# Altium PCB Copy of WoodStoveLayout2.PcbDoc (part 4 of 4)
Units mil, origin at the board's own origin, x right, y up, seen from the top; angles counter-clockwise.
Board outline 4000 x 3000 mil, 4 copper layers (Top Layer, L2, L3, Bottom Layer), stack 64.6 mil thick; 132 components, 92 nets, 551 pads, 53 vias.
Unrouted connection lines stored in the file: 211.
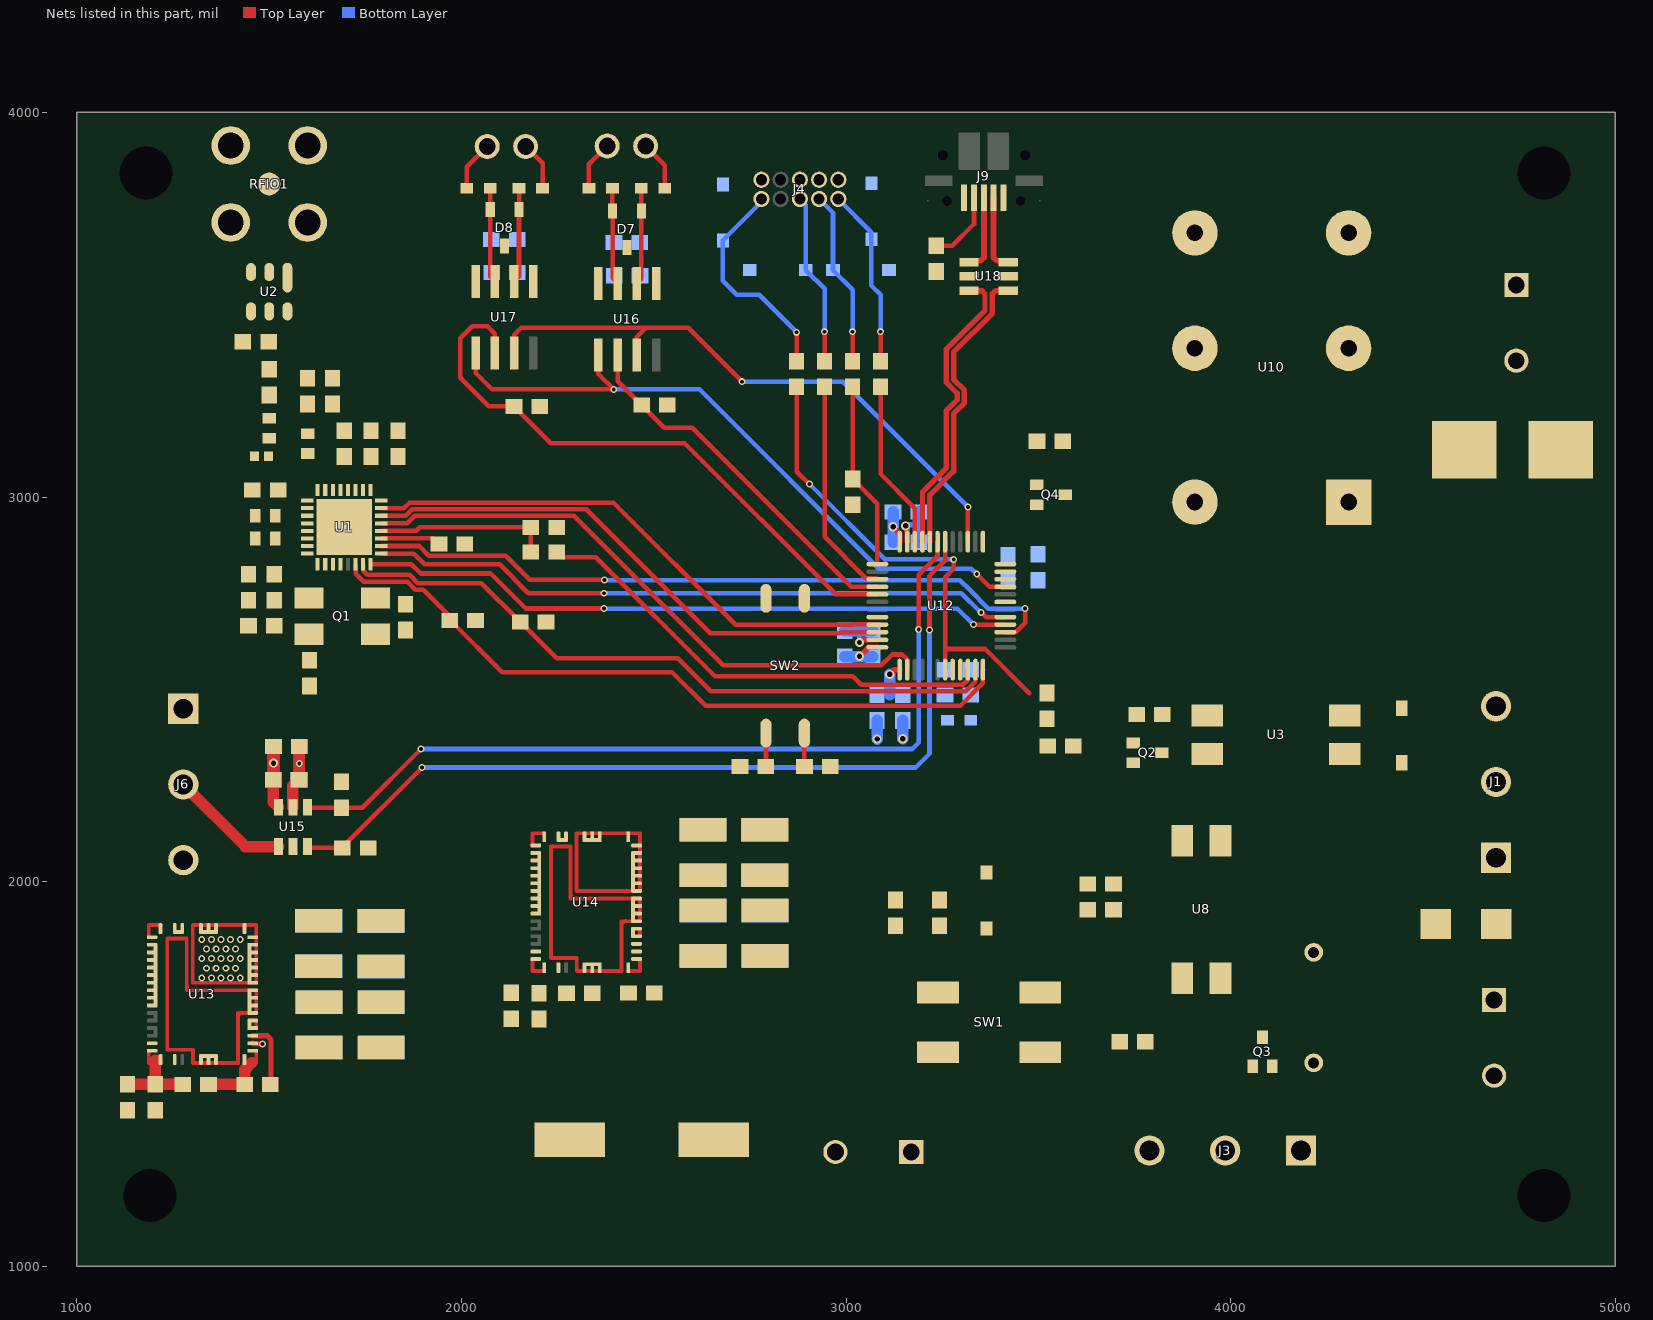
[diagram p4: the nets of this part, all layers, seen from the top]

## Part data (continued)
U3 U8: "OPTOISOLATOR 5KV TRANSISTOR 4SMD 20mA/1.2V saturation", Case/Package=SMD/SMT, Collector Emitter Saturation Voltage=200mV, Current Transfer Ratio=600%, Forward Current=50mA, Forward Voltage=1.4V, Isolation Voltage=5kV, Manufacturer="ON Semiconductor / Fairchild", Max Operating Temperature=110°C, Max Output Voltage=70V, Max Power Dissipation=200mW, Min Operating Temperature=-55°C, Package Quantity=1, Reverse Breakdown Voltage=6V, Supplier Part Number 1=FOD817D3SDTR-ND, Collector Emitter Voltage (VCEO)=200mV, ComponentLink1Description=https://datasheet.ciiva.com/25620/0900766b810e24fa-25620565.pdf, ComponentLink1URL=https://datasheet.ciiva.com/25620/0900766b810e24fa-25620565.pdf, ComponentLink2Description=https://datasheet.ciiva.com/26122/fod817d-26122105.pdf, ComponentLink2URL=https://datasheet.ciiva.com/26122/fod817d-26122105.pdf, ComponentLink3Description=https://datasheet.ciiva.com/15118/getdatasheetpartid-67082-15118458.pdf, ComponentLink3URL=https://datasheet.ciiva.com/15118/getdatasheetpartid-67082-15118458.pdf, ComponentLink4Description=https://datasheet.ciiva.com/2086/fod817d-2086155.pdf, ComponentLink4URL=https://datasheet.ciiva.com/2086/fod817d-2086155.pdf, ComponentLink5Description=https://datasheet.ciiva.com/46433/1563587-46433595.pdf, ComponentLink5URL=https://datasheet.ciiva.com/46433/1563587-46433595.pdf, ComponentLink6Description=https://datasheet.ciiva.com/2086/fod817d-2086156.pdf, ComponentLink6URL=https://datasheet.ciiva.com/2086/fod817d-2086156.pdf, ComponentLink7Description=https://datasheet.ciiva.com/2086/fod817d-2086157.pdf, ComponentLink7URL=https://datasheet.ciiva.com/2086/fod817d-2086157.pdf, ComponentLink8Description=https://datasheet.ciiva.com/8095/fod817d-8095549.pdf, ComponentLink8URL=https://datasheet.ciiva.com/8095/fod817d-8095549.pdf, ComponentLink9Description=https://datasheet.ciiva.com/4701/fod817d-4701711.pdf, ComponentLink9URL=https://datasheet.ciiva.com/4701/fod817d-4701711.pdf, ComponentLink10Description=https://datasheet.ciiva.com/17001/fod817-17001647.pdf, ComponentLink10URL=https://datasheet.ciiva.com/17001/fod817-17001647.pdf, Fall Time=18000ns, Input Current=50mA, Lead Free="Lead Free", Manufacturer Part Number=FOD817D3SD, Max Collector Current=50mA, Max Input Current=50mA, Mount="Surface Mount", Number of Channels=1, Number of Circuits=1, Number of Elements=1, Number of Pins=4, Output Current per Channel=50mA, Output Voltage=70V, Packaging="Tape and Reel", Power Dissipation=200mW, Pricing 1="1000=0.15939, 2000=0.14611, 5000=0.13283, 10000=0.12397, 25000=0.11954, 50000=0.11512 (USD)", Radiation Hardening=No, REACH SVHC="No SVHC", Rise Time=18000ns, Stock 1=123000, Supplier 1=Digi-Key, Weight=0g
U5: "DIODE SCHOTTKY 40V 1A SOD123"
U10: "RELAY GENERAL PURPOSE DPST 8A 3V 67mA coil drive 45ohm coil resistance"
U11: Case/Package=SMD/SMT, Current Rating=2A, DC Cold Resistance=39mR, Manufacturer=Bel, Manufacturer Part Number=SSQ2, Max Operating Temperature=125°C, Min Operating Temperature=-55°C, Supplier Part Number 1=507-1048-2-ND, Voltage Rating (AC)=125V, Approvals=CSA,CE,cULus, ComponentLink1Description=https://datasheet.ciiva.com/300/ssq-300722.pdf, ComponentLink1URL=https://datasheet.ciiva.com/300/ssq-300722.pdf, ComponentLink2Description=https://datasheet.ciiva.com/300/ssq-300723.pdf, ComponentLink2URL=https://datasheet.ciiva.com/300/ssq-300723.pdf, ComponentLink3Description=https://datasheet.ciiva.com/300/ssq-300724.pdf, ComponentLink3URL=https://datasheet.ciiva.com/300/ssq-300724.pdf, Fuse Type="Board Mount (Cartridge Style Excluded)", Height=0.1inch, Length=0.24inch, Mount="Surface Mount", Packaging="Tape and Reel", Pricing 1="1000=0.15908, 2000=0.14847, 3000=0.14582, 5000=0.14317, 10000=0.13787 (USD)", Stock 1=59000, Supplier 1=Digi-Key, Voltage Rating (DC)=125V, Width=0.1inch
U12: library part STM32L433CCTx
U13 U14: "4V to 36V, 2A Step-Down DC/DC Power Module"
U15: "Self-Calibrating, 16-Bit Analog-to-Digital Converter 6-SOT-23 -40 to 85"
U16 U17: "K type thermocouple amplifier"
U18: "2-Channel Ultra Low Clamp Voltage ESD Solution with Series-Resistor Isolation 6-SOT-23 -40 to 85", Package="SOT-23-6 Texas Instruments", Availability=Good, MF="Texas Instruments", MP=TPD2S017DBVR, Price="0.32 USD", SnapEDA_Link=https://www.snapeda.com/parts/TPD2S017DBVR/Texas%20Instruments/view-part/?ref=snap

## Free pads (board coordinates)
  round 60 hole 137.8 unplated: 2(1180,3842) 2(1191,1184) 2(4815,1184) 2(4815,3842)

## Via types
v1: diameter 18, hole 10, Top Layer to Bottom Layer, tented top, 23 vias
v2: diameter 18, hole 10, Top Layer to Bottom Layer, 22 vias
v3: diameter 24, hole 14, Top Layer to Bottom Layer, 8 vias

## Nets (pads, with @x,y where several pads share a name; then routed paths per layer and width w, separated by ;. In a path a pad name is that pad's centre, name@x,y a point inside that pad or via, vN(x,y) a via of type N, cw(c..) or ccw(c..) an arc to the next point about the centre after c; other vN are vias at no path point)
3VSWRelief: U14.9 U14.10 U14.11
"5V PWM": J1.3 U3.4 U5.C
5VSWRelief: U13.9 U13.10 U13.11
12V: J3.1 Q3.3
12VFAN: D?.1 J1.1 J2.1
+3V3: C1.2 C16.2 C17.2 C18.2 C19.2 C20.2 C21.2 C22.2 C23.2 C39.2 C40.2 C41.2 C42.2 C43.2 C48.2 C49.2 C50.2 C51.2 FB1.1 J4.1 R1.2 R4.2 R5.2 R8.1 R10.2 R11.1 R17.2 R22.2 R23.2 R27.2 R32.2 R35.2 R36.2 R37.2 R38.2 U1.26 U12.1 U12.24 U12.36 U12.48 U14.6 U14.7 U14.8 U16.4 U17.4 | length 337.5
  Top Layer w14: v3(3035,2586) 3058.3,2609.3 U12.48@3081.52,2609.3 ; v3(3114,2539) 3126.23,2551.23 U12.1@3139.59,2551.23 ; v3(3122.4,2922.6) 3139.59,2905.41 U12.36@3139.59,2883.91
  Bottom Layer w14: v3(3122.4,2922.6) v3@3122.4,2927
  Bottom Layer w30: C21.2@2996.86,2585.11 C17.2@3069.85,2585.11 ; 3114,2486.04 v3(3114,2539) ; C18.2@3122.4,2882.57 v3(3122.4,2922.6) ; v3@3122.4,2927 C22.2@3122.4,2961.49
+5V: C29.2 C30.2 C31.2 C32.2 C33.2 C44.2 C45.2 C46.2 C47.2 J6.1 R29.2 U13.6 U13.7 U13.8 U15.5 | length 251.6
  Top Layer w30: U15.5@1562,2193.66 1562,2249 C45.2@1578,2265 v2@1578,2307.39 ; v2(1578.39,2307.39) C44.2@1578.39,2351.48
  Bottom Layer w30: C46.2@1578,2265 1578.39,2265.39 v2(1578.39,2307.39) ; v2@1578,2307 v2(1578.39,2307.39) ; C47.2@1578.39,2351.48 v2(1578.39,2307.39)
  other v1: 1325,1750 1350,1750 1375,1750 1400,1750 1425,1750 1337.5,1775 1362.5,1775 1387.5,1775 1412.5,1775 1325,1800 1350,1800 1375,1800 1400,1800 1425,1800 1337.5,1825 1362.5,1825 1387.5,1825 1412.5,1825 1325,1850 1350,1850 1375,1850 1400,1850 1425,1850
+12V: C25.2 C26.2 C27.2 C28.2 C34.1 C35.2 C36.2 C37.2 C38.2 J10.2 U13.2 U13.4 U14.2 U14.4 | length 26.1
  Top Layer w14: U13.2@1457.7,1579.95 U13.2@1457.7,1579.95 1459.75,1578 v2(1483,1578)
"AC In": J5.2 U11.1
"AC Out": J5.1 U10.4
ACFUSE: U10.3 U11.2
DoorSig: J3.2 Q3.1
FANGND: D?.2 J1.2 J2.2 U3.3 U5.A
GND: C1.1 C2.1 C3.1 C4.2 C6.1 C7.1 C8.1 C11.2 C14.1 C15.1 C16.1 C17.1 C18.1 C19.1 C20.1 C21.1 C22.1 C23.1 C25.1 C26.1 C27.1 C28.1 C30.1 C31.1 C32.1 C33.1 C34.2 C35.1 C36.1 C37.1 C38.1 C40.1 C41.1 C42.1 C43.1 C44.1 C45.1 C46.1 C47.1 C48.1 C49.1 C50.1 C51.1 D2.A D3.A D4.A D5.A D6.A D7.3 D8.3 J3.3 J4.3 J4.5 J4.9 J6.3 J9.5 J10.1 Q1.2 Q1.4 Q2.2 Q4.2 R3.1 R7.1 R25.2 R28.1 R39.1 RFIO1.P1 RFIO1.P2 RFIO1.P3 RFIO1.P4 SW1.3 SW1.4 U1.0 U1.1 U1.2 U1.8 U1.9 U1.12 U1.24 U1.25 U1.30 U1.32 U2.1 U2.3 U2.4 U2.6 U8.2 U8.3 U10.5 U10.6 U12.8 U12.23 U12.35 U12.47 U13.5 U13.14 U13.18 U14.5 U14.14 U14.18 U15.2 U15.6 U16.1 U17.1 U18.2 | length 662.5
  Top Layer w14: v3(3035,2622) 3041.99,2628.99 U12.47@3081.52,2628.99 ; v3(3155,2925) 3159.28,2920.72 U12.35@3159.28,2883.91
  Top Layer w30: C44.1@1511.46,2351.48 v3(1511.46,2308.44) 1511.46,2265.39 C45.1@1511.07,2265 1511.07,2207.19 U15.6@1524.6,2193.66
  Bottom Layer w14: 3033,2652.04 3035,2650.04 v3(3035,2622) ; v3(3155,2925) 3152,2928 3189.32,2928
  Bottom Layer w30: C46.1@1511.07,2265 1511.46,2265.39 v3(1511.46,2308.44) C47.1@1511.46,2351.48 ; C21.1@2996.86,2652.04 3033,2652.04 C17.1@3069.85,2652.04 ; v3(3080.86,2371) C20.1@3080.86,2419.11 ; v3(3147.59,2371.59) C16.1@3147.59,2419.11 ; C18.1@3189.32,2882.57 3189.32,2928 C22.1@3189.32,2961.49
NetC2_2: C2.2 U1.27
NetC3_2: C3.2 U1.28
NetC4_1: C4.1 Q1.3 U1.11
NetC5_1: C5.1 C6.2 U2.5
NetC5_2: C5.2 L2.1
NetC7_2: C7.2 Q1.1 U1.10
NetC8_2: C8.2 L1.1 L2.2 U1.31
NetC9_1: C9.1 C12.1 U1.6
NetC9_2: C9.2 R6.2 U1.7
NetC10_1: C10.1 R7.2
NetC10_2: C10.2 L1.2 U1.29
NetC11_1: C11.1 L3.1 L4.1 U1.3
NetC12_2: C12.2 R6.1
NetC13_2: C13.2 R25.1
NetC14_2: C14.2 C15.2 FB1.2 U12.9
NetC29_1: C29.1 R29.1 R31.2 U13.15 U13.16 | length 206.4
  Top Layer w30: C29.1@1131.8,1472.91 R29.1@1204.16,1472.91 ; 1204.16,1535.68 1204.16,1528.77 R29.1@1204.16,1472.91 ; R31.2@1275.42,1472.91 R29.1@1204.16,1472.91
NetC39_1: C39.1 R32.1 R34.2 U14.15 U14.16
NetD1_1: D1.1 R10.1 U8.4 U12.19
NetD1_2: D1.2 R11.2
NetD2_C: D2.C J4.2 R16.2 | length 467.1
  Top Layer w12: R16.2@3090,3353.46 v2(3090,3430)
  Bottom Layer w12: J4.2@2980,3775.04 3066.04,3689.01 D2.C@3066.04,3670 3066.04,3550 3090,3526.04 v2(3090,3430)
NetD3_C: D3.C J4.4 R15.2 | length 457.7
  Top Layer w12: R15.2@3017.21,3353.46 v2(3017.21,3430)
  Bottom Layer w12: J4.4@2930,3775.04 2966.26,3738.79 D3.C@2966.26,3590 3017.21,3539.05 v2(3017.21,3430)
NetD4_C: D4.C J4.6 R14.2 | length 448.3
  Top Layer w12: R14.2@2944.42,3353.46 v2(2944.42,3430)
  Bottom Layer w12: J4.6@2880,3775.04 2895.67,3759.37 D4.C@2895.67,3590 2944.42,3541.25 v2(2944.42,3430)
NetD5_C: D5.C J4.10 R13.2 | length 576.4
  Top Layer w12: R13.2@2871.63,3353.46 v2(2871.63,3428.37)
  Bottom Layer w12: J4.10@2780,3775.04 2780,3767.17 D5.C@2680,3667.17 2680,3562 2715.96,3526.04 2773.96,3526.04 v2(2871.63,3428.37)
NetD6_C: D6.C R23.1 R24.2 SW1.1 SW1.2
NetD7_1: D7.1 FB2.2 U16.2 | length 252
  Top Layer w12: U16.2@2456.09,3555.61 2467.9,3567.41 D7.1@2467.9,3743.61 2467.9,3802.29 FB2.2@2467.58,3802.61
NetD7_2: D7.2 FB3.2 U16.3 | length 252.6
  Top Layer w12: FB3.2@2392.6,3802.61 2392.6,3744.1 D7.2@2393.09,3743.61 2393.09,3568.61 U16.3@2406.09,3555.61
NetD8_1: D8.1 FB4.2 U17.2 | length 247.4
  Top Layer w12: U17.2@2137.09,3560.61 2149.9,3573.41 D8.1@2149.9,3747.61 2150.09,3747.81 FB4.2@2150.09,3802.61
NetD8_2: D8.2 FB5.2 U17.3 | length 247
  Top Layer w12: FB5.2@2075.09,3802.61 D8.2@2075.09,3747.61 2075.09,3572.61 U17.3@2087.09,3560.61
NetFB2_1: FB2.1 J7.2 | length 130.5
  Top Layer w12: J7.2@2479.09,3912.61 2528.6,3863.1 FB2.1@2528.6,3802.61
NetFB3_1: FB3.1 J7.1 | length 129.7
  Top Layer w12: FB3.1@2331.58,3802.61 2331.58,3865.1 J7.1@2379.09,3912.61
NetFB4_1: FB4.1 J8.2 | length 127.2
  Top Layer w12: J8.2@2167.09,3911.61 2211.12,3867.58 FB4.1@2211.12,3802.61
NetFB5_1: FB5.1 J8.1 | length 131
  Top Layer w12: FB5.1@2014.07,3802.61 2014.07,3858.58 J8.1@2067.09,3911.61
NetJ9_4: J9.4 R39.2 | length 189.4
  Top Layer w12: R39.2@3234.76,3653.46 3276.3,3653.46 3332.85,3710.01 J9.4@3332.85,3777.92
NetL3_2: L3.2 U1.4
NetL4_2: L4.2 U1.5
NetQ2_1: Q2.1 U12.22
NetQ2_3: Q2.3 U3.2
NetQ3_2: Q3.2 R9.2
NetQ4_1: Q4.1 U12.25
NetQ4_3: Q4.3 U10.1
NetR1_1: R1.1 R2.1 U1.20 | length 456.7
  Top Layer w12: U1.20@1791.59,2912.11 1883.08,2912.11 1892.04,2921.06 R1.1@2180.63,2921.06 R2.1@2180.63,2857.06
NetR2_2: R2.2 U12.10 | length 1244.4
  Top Layer w12: R2.2@2247.56,2857.06 2261.24,2843.37 2349.84,2843.37 2659.41,2533.8 3017.42,2533.8 3039.53,2511.69 3304.07,2511.69 3316.66,2524.28 3316.66,2551.14 U12.10@3316.76,2551.23
NetR3_2: R3.2 U1.19 | length 156.2
  Top Layer w12: U1.19@1791.59,2892.42 1791.9,2892.74 1926.95,2892.74 R3.2@1941.63,2878.06
NetR4_1: R4.1 U1.14 U12.12 | length 1865
  Top Layer w12: U1.14@1724.86,2825.69 1724.86,2800.39 1745.86,2779.39 1859.96,2779.39 1879.96,2759.39 1900.38,2759.39 1969.63,2690.14 R4.1@1969.63,2679.06 1971.6,2679.06 2105.8,2544.86 2547.67,2544.86 2635.3,2457.22 3297.69,2457.22 3356.03,2515.56 3356.03,2551.14 U12.12@3356.13,2551.23
NetR5_1: R5.1 U1.15 U12.11 | length 1780.7
  Top Layer w12: U1.15@1744.54,2825.69 1744.54,2808.56 1755,2798.1 1865.29,2798.1 1887,2776.39 2052.13,2776.39 R5.1@2153.13,2675.39 2247.88,2580.64 2562.23,2580.64 2648.18,2494.69 3311.12,2494.69 3336.35,2519.92 3336.35,2551.14 U12.11@3336.44,2551.23
NetR8_2: R8.2 U3.1
NetR9_1: R9.1 U8.1
NetR14_1: R14.1 U12.39 | length 572.6
  Top Layer w12: R14.1@2944.42,3286.54 2944.42,2896.71 3051.88,2789.25 3078.74,2789.25 U12.39@3081.52,2786.47
NetR15_1: R15.1 R17.1 U12.37 | length 487.3
  Top Layer w12: R15.1@3017.21,3286.54 3017.21,3047.15 R17.1@3017.42,3046.94 3081.52,2982.83 U12.37@3081.52,2825.84
NetR16_1: R16.1 U12.34 | length 439.5
  Top Layer w12: R16.1@3090,3286.54 3090,3060 3178.96,2971.04 U12.34@3178.96,2883.91
NetR22_1: R22.1 U10.8
NetR27_1: R27.1 SW2.3 | length 87
  Top Layer w12: R27.1@2791.32,2299.57 2791.86,2300.11 SW2.3@2791.86,2386.37
NetR28_2: R28.2 SW2.4 | length 86.8
  Top Layer w12: SW2.4@2891.86,2386.37 R28.2@2891.93,2299.57 R28.2@2891.93,2299.57
NetR30_1: R30.1 R31.1 U13.1 | length 157.5
  Top Layer w30: R31.1@1342.35,1472.91 1342.44,1473 R30.1@1436.54,1473 1436.54,1510.78 1454.53,1528.77
NetR30_2: R30.2 U13.3 | length 170.9
  Top Layer w14: U13.3@1457.7,1599.64 1495.06,1599.64 1505,1589.7 1505,1479.37 R30.2@1511.46,1472.91
NetR33_1: R33.1 R34.1 U14.1
NetR33_2: R33.2 U14.3
NetR35_1: R35.1 U12.30 U15.3 | length 2289.1
  Top Layer w12: U15.3@1599.4,2091.3 1602.7,2088 R35.1@1690.54,2088 1690.54,2089.54 v2(1898,2297) ; v2(3217,2654) 3217,2795 3257.7,2835.7 U12.30@3257.7,2883.91
  Bottom Layer w12: v2(1898,2297) 3181,2297 3217,2333 v2(3217,2654)
NetR36_1: R36.1 U12.31 U15.4 | length 2202.5
  Top Layer w12: U15.4@1599.4,2193.66 1600.53,2192.54 R36.1@1688,2192.54 1742.54,2192.54 v2(1895,2345) ; v2(3189,2656) 3189,2798 3238.02,2847.02 U12.31@3238.02,2883.91
  Bottom Layer w12: v2(1895,2345) 3172,2345 3189,2362 v2(3189,2656)
NetR37_1: R37.1 U12.40 U16.6 | length 965.1
  Top Layer w12: U16.6@2406.09,3369.61 2406.09,3301.44 R37.1@2468.54,3239 2527.54,3180 2600,3180 3013.22,2766.78 U12.40@3081.52,2766.78
NetR38_1: R38.1 U12.41 U17.6 | length 1582
  Top Layer w12: U17.6@2087.09,3374.61 2087,3374.52 2087,3425 2068,3444 2028,3444 1997,3413 1997,3310 2071.33,3235.67 R38.1@2136.63,3235.67 2232.3,3140 2580,3140 2972.9,2747.1 U12.41@3081.52,2747.1
NetRFIO1_1: RFIO1.1 U2.2
NetSW2_1: SW2.1 SW2.2 U12.44
NetU1_16: U1.16 U12.16 | length 1713.6
  Top Layer w12: U1.16@1764.23,2825.69 1869.7,2825.69 1894,2801.39 2076.61,2801.39 2167.61,2710.39 v2@2369.58,2710.39 ; v2(3331.64,2668.36) U12.16@3414.2,2668.36
  Bottom Layer w12: v2(2371,2710) 3290,2710 v2(3331.64,2668.36)
NetU1_17: U1.17 U12.17 | length 1689.4
  Top Layer w12: U1.17@1791.59,2853.05 1876.34,2853.05 1904.38,2825 2099.38,2825 2174,2750.39 v2@2369.58,2750.39 ; v2(3351.55,2700) 3353.17,2700 3365.13,2688.04 U12.17@3414.2,2688.04
  Bottom Layer w12: v2(2371,2750) 3300,2750 3350,2700 v2(3351.55,2700)
NetU1_18: U1.18 U12.15 | length 1837.2
  Top Layer w12: U1.18@1791.59,2872.74 1890.06,2872.74 1915.42,2847.37 2115.01,2847.37 2177.42,2784.96 v2@2369.58,2784.96 ; U12.15@3414.2,2648.67 3414.29,2648.77 3441.15,2648.77 3465.72,2673.33 v2(3465.72,2710)
  Bottom Layer w12: v2(2372,2784) 3296.05,2784 3321.25,2758.8 3321.25,2758.58 3369.83,2710 v2(3465.72,2710)
NetU1_21: U1.21 U12.2 | length 1580.6
  Top Layer w12: U1.21@1791.59,2931.79 1859.2,2931.79 1879.15,2951.74 2291.82,2951.74 2680.56,2563 3092,2563 3119.78,2590.78 3146.59,2590.78 3159.18,2578.19 3159.18,2551.33 U12.2@3159.28,2551.23
NetU1_22: U1.22 U12.46 | length 1431.6
  Top Layer w12: U1.22@1791.59,2951.48 1854.84,2951.48 1872.11,2968.74 2325.16,2968.74 2647.55,2646.36 2986.16,2646.36 2988.48,2648.67 U12.46@3081.52,2648.67
NetU1_23: U1.23 U12.45 | length 1428
  Top Layer w12: U1.23@1791.59,2971.16 1850.48,2971.16 1865.07,2985.74 2395.49,2985.74 2712.87,2668.36 3016.81,2668.36 3017.44,2668.99 3080.89,2668.99 U12.45@3081.52,2668.36
NetU12_21: U12.21 U16.5 U17.5 | length 1765.6
  Top Layer w12: U17.5@2037.09,3374.61 2037.09,3322.5 2079.59,3280 v2(2396.09,3280) 2356.09,3320 U16.5@2356.09,3369.61 ; v2(3340,2800) 3373.22,2766.78 U12.21@3414.2,2766.78
  Bottom Layer w12: v2(2396.09,3280) 2619,3280 3085,2814 3326,2814 v2(3340,2800)
NetU12_27: U12.27 U16.7 U17.7 | length 1598.2
  Top Layer w12: U17.7@2137.09,3374.61 2137.09,3422.15 2154.94,3440 2480,3440 ; U16.7@2456.09,3369.61 2456.09,3416.09 2480,3440 ; v2(2730,3300) 2590,3440 2480,3440 ; U12.27@3316.76,2883.91 v2(3316.76,2974.36)
  Bottom Layer w12: v2(2730,3300) 2991.12,3300 v2(3316.76,2974.36)
PSENSOR: J6.2 U15.1 | length 314.5
  Top Layer w30: J6.2@1277,2252.85 1438.55,2091.3 U15.1@1524.6,2091.3
RSTNET: C13.1 R13.1 R24.1 U12.7 | length 1286.2
  Top Layer w12: R13.1@2871.63,3286.54 2871.63,3066.37 2904,3034 v2(2905,3034) ; U12.7@3257.7,2551.23 3257.7,2605 ; v2(3280,2838) 3280,2814.3 3257.7,2792 3257.7,2605 ; 3476.54,2490.46 3362,2605 3257.7,2605
  Bottom Layer w12: v2(2905,3034) 3102,2837 3103,2838 v2(3280,2838)
USB5V: J9.1 U18.5
USB_N: U12.32 U18.1 | length 780
  Top Layer w14: U12.32@3218.33,2883.91 3217.99,2884.25 3217.99,3005.6 3280.03,3067.64 3280.03,3217 3307.83,3244.8 3307.83,3277.87 3280.03,3305.67 3280.03,3377 3380.53,3477.5 3380.53,3528.42 3388.73,3536.62 3421.73,3536.62 U18.1@3422.03,3536.92
USB_P: U12.33 U18.6 | length 780
  Top Layer w14: U12.33@3198.65,2883.91 3198.99,2884.25 3198.99,3013.47 3261.03,3075.51 3261.03,3224.87 3288.83,3252.67 3288.83,3270 3261.03,3297.8 3261.03,3384.87 3361.53,3485.37 3361.53,3528.42 3353.33,3536.62 3320.33,3536.62 U18.6@3320.03,3536.92
USBOUT_N: J9.2 U18.3 | length 198.5
  Top Layer w15: J9.2@3384.03,3777.92 3383.73,3777.62 3383.73,3696.66 3383.53,3696.46 3383.53,3623.2 3392.31,3614.42 3418.53,3614.42 U18.3@3422.03,3610.92
USBOUT_P: J9.3 U18.4 | length 198.5
  Top Layer w15: U18.4@3320.03,3610.92 3323.53,3614.42 3349.74,3614.42 3358.53,3623.2 3358.53,3706.81 3358.73,3707.02 3358.73,3777.62 J9.3@3358.44,3777.92
pads on no net: J4.7 J4.8 J9.None J9.P1 J9.P2 J9.P3 J9.P4 J9.P5 J9.P6 U1.13 U12.3 U12.4 U12.5 U12.6 U12.13 U12.14 U12.18 U12.20 U12.26 U12.28 U12.29 U12.38 U12.42 U12.43 U13.12 U13.13 U13.17 U14.12 U14.13 U14.17 U16.8 U17.8

## Polygon pours and split planes (outlines as drawn)
"AC In" on L2 (split plane): 4979.9,2775.08 4740.07,2775.08 4740.07,3191.87 4739.78,3194.81 4738.93,3197.64 4737.53,3200.24 4735.66,3202.53 4503.26,3434.93 4979.9,3434.93
+5V on L2 (split plane): 4821.37,3906.67 4827.68,3905.73 4833.86,3904.18 4839.87,3902.03 4845.63,3899.31 4851.1,3896.03 4856.22,3892.23 4860.95,3887.95 4865.23,3883.22 4869.03,3878.1 4872.31,3872.63 4875.03,3866.87 4877.18,3860.86 4878.73,3854.68 4879.67,3848.37 4879.98,3842 4879.67,3835.63 4878.73,3829.32 4877.18,3823.14 4875.03,3817.13 4872.31,3811.37 4869.03,3805.9 4865.23,3800.78 4860.95,3796.05 4856.22,3791.77 4851.1,3787.97 4845.63,3784.69 4839.87,3781.97 4833.86,3779.82 4827.68,3778.27 4821.37,3777.33 4815,3777.02 4808.63,3777.33 4802.32,3778.27 4796.14,3779.82 4790.13,3781.97 4784.37,3784.69 4778.9,3787.97 4773.78,3791.77 4769.05,3796.05 4764.77,3800.78 4760.97,3805.9 4757.69,3811.37 4754.97,3817.13 4752.82,3823.14 4751.27,3829.32 4750.33,3835.63 4750.02,3842 4750.33,3848.37 4751.27,3854.68 4752.82,3860.86 4754.97,3866.87 4757.69,3872.63 4760.97,3878.1 4764.77,3883.22 4769.05,3887.95 4773.78,3892.23 4778.9,3896.03 4784.37,3899.31 4790.13,3902.03 4796.14,3904.18 4802.32,3905.73 4808.63,3906.67 4815,3906.98
+5V on L2 (split plane): 4821.37,1248.67 4827.68,1247.73 4833.86,1246.18 4839.87,1244.03 4845.63,1241.31 4851.1,1238.03 4856.22,1234.23 4860.95,1229.95 4865.23,1225.22 4869.03,1220.1 4872.31,1214.63 4875.03,1208.87 4877.18,1202.86 4878.73,1196.68 4879.67,1190.37 4879.98,1184 4879.67,1177.63 4878.73,1171.32 4877.18,1165.14 4875.03,1159.13 4872.31,1153.37 4869.03,1147.9 4865.23,1142.78 4860.95,1138.05 4856.22,1133.77 4851.1,1129.97 4845.63,1126.69 4839.87,1123.97 4833.86,1121.82 4827.68,1120.27 4821.37,1119.33 4815,1119.02 4808.63,1119.33 4802.32,1120.27 4796.14,1121.82 4790.13,1123.97 4784.37,1126.69 4778.9,1129.97 4773.78,1133.77 4769.05,1138.05 4764.77,1142.78 4760.97,1147.9 4757.69,1153.37 4754.97,1159.13 4752.82,1165.14 4751.27,1171.32 4750.33,1177.63 4750.02,1184 4750.33,1190.37 4751.27,1196.68 4752.82,1202.86 4754.97,1208.87 4757.69,1214.63 4760.97,1220.1 4764.77,1225.22 4769.05,1229.95 4773.78,1234.23 4778.9,1238.03 4784.37,1241.31 4790.13,1244.03 4796.14,1246.18 4802.32,1247.73 4808.63,1248.67 4815,1248.98
ACFUSE on L2 (split plane): 4457.2,3444.6 4457.49,3441.66 4458.34,3438.83 4459.74,3436.23 4461.61,3433.94 4709.93,3185.63 4709.93,2775.08 4475.08,2775.08 4475.08,3100 4474.76,3105.61 4473.82,3111.14 4472.27,3116.54 4470.12,3121.73 4467.4,3126.64 4464.15,3131.22 4460.41,3135.41 4456.22,3139.15 4451.64,3142.4 4446.73,3145.12 4441.54,3147.27 4436.14,3148.82 4430.61,3149.76 4425,3150.08 4100.08,3150.08 4100.08,3509.93 4457.2,3509.93
"AC Out" on L2 (split plane): 4979.9,3465.07 4487.34,3465.07 4487.34,3522.85 4487.05,3525.79 4486.19,3528.62 4484.8,3531.22 4482.93,3533.51 4480.78,3535.66 4478.49,3537.53 4475.89,3538.93 4473.06,3539.78 4470.12,3540.07 4100.08,3540.07 4100.08,3979.9 4979.9,3979.9
+5V on L2 (split plane): 1186.37,3906.67 1192.68,3905.73 1198.86,3904.18 1204.87,3902.03 1210.63,3899.31 1216.1,3896.03 1221.22,3892.23 1225.95,3887.95 1230.23,3883.22 1234.03,3878.1 1237.31,3872.63 1240.03,3866.87 1242.18,3860.86 1243.73,3854.68 1244.67,3848.37 1244.98,3842 1244.67,3835.63 1243.73,3829.32 1242.18,3823.14 1240.03,3817.13 1237.31,3811.37 1234.03,3805.9 1230.23,3800.78 1225.95,3796.05 1221.22,3791.77 1216.1,3787.97 1210.63,3784.69 1204.87,3781.97 1198.86,3779.82 1192.68,3778.27 1186.37,3777.33 1180,3777.02 1173.63,3777.33 1167.32,3778.27 1161.14,3779.82 1155.13,3781.97 1149.37,3784.69 1143.9,3787.97 1138.78,3791.77 1134.05,3796.05 1129.77,3800.78 1125.97,3805.9 1122.69,3811.37 1119.97,3817.13 1117.82,3823.14 1116.27,3829.32 1115.33,3835.63 1115.02,3842 1115.33,3848.37 1116.27,3854.68 1117.82,3860.86 1119.97,3866.87 1122.69,3872.63 1125.97,3878.1 1129.77,3883.22 1134.05,3887.95 1138.78,3892.23 1143.9,3896.03 1149.37,3899.31 1155.13,3902.03 1161.14,3904.18 1167.32,3905.73 1173.63,3906.67 1180,3906.98
+5V on L2 (split plane): 3624.92,3100 3625.24,3094.39 3626.18,3088.86 3627.73,3083.46 3629.88,3078.27 3632.6,3073.36 3635.85,3068.78 3639.59,3064.59 3643.78,3060.85 3648.36,3057.6 3653.27,3054.88 3658.46,3052.73 3663.86,3051.18 3669.39,3050.24 3675,3049.92 4374.92,3049.92 4374.92,2725 4375.24,2719.39 4376.18,2713.86 4377.73,2708.46 4379.88,2703.27 4382.6,2698.36 4385.85,2693.78 4389.59,2689.59 4393.78,2685.85 4398.36,2682.6 4403.27,2679.88 4408.46,2677.73 4413.86,2676.18 4419.39,2675.24 4425,2674.92 4979.9,2674.92 4979.9,1020.1 1020.1,1020.1 1020.1,3979.9 3624.92,3979.9
+5V on L2 (split plane): 1197.37,1248.67 1203.68,1247.73 1209.86,1246.18 1215.87,1244.03 1221.63,1241.31 1227.1,1238.03 1232.22,1234.23 1236.95,1229.95 1241.23,1225.22 1245.03,1220.1 1248.31,1214.63 1251.03,1208.87 1253.18,1202.86 1254.73,1196.68 1255.67,1190.37 1255.98,1184 1255.67,1177.63 1254.73,1171.32 1253.18,1165.14 1251.03,1159.13 1248.31,1153.37 1245.03,1147.9 1241.23,1142.78 1236.95,1138.05 1232.22,1133.77 1227.1,1129.97 1221.63,1126.69 1215.87,1123.97 1209.86,1121.82 1203.68,1120.27 1197.37,1119.33 1191,1119.02 1184.63,1119.33 1178.32,1120.27 1172.14,1121.82 1166.13,1123.97 1160.37,1126.69 1154.9,1129.97 1149.78,1133.77 1145.05,1138.05 1140.77,1142.78 1136.97,1147.9 1133.69,1153.37 1130.97,1159.13 1128.82,1165.14 1127.27,1171.32 1126.33,1177.63 1126.02,1184 1126.33,1190.37 1127.27,1196.68 1128.82,1202.86 1130.97,1208.87 1133.69,1214.63 1136.97,1220.1 1140.77,1225.22 1145.05,1229.95 1149.78,1234.23 1154.9,1238.03 1160.37,1241.31 1166.13,1244.03 1172.14,1246.18 1178.32,1247.73 1184.63,1248.67 1191,1248.98
"AC Out" on L3 (split plane): 4979.9,3465.07 4487.19,3465.07 4487.19,3525 4486.9,3527.94 4486.04,3530.77 4484.65,3533.37 4482.78,3535.66 4480.49,3537.53 4477.89,3538.93 4475.06,3539.78 4472.12,3540.07 4100.08,3540.07 4100.08,3979.9 4979.9,3979.9
"AC In" on L3 (split plane): 4979.9,2780.08 4739.45,2780.08 4739.45,3192.25 4739.16,3195.19 4738.3,3198.02 4736.91,3200.62 4735.04,3202.91 4503.01,3434.93 4979.9,3434.93
+3V3 on L3 (split plane): 4821.37,3906.67 4827.68,3905.73 4833.86,3904.18 4839.87,3902.03 4845.63,3899.31 4851.1,3896.03 4856.22,3892.23 4860.95,3887.95 4865.23,3883.22 4869.03,3878.1 4872.31,3872.63 4875.03,3866.87 4877.18,3860.86 4878.73,3854.68 4879.67,3848.37 4879.98,3842 4879.67,3835.63 4878.73,3829.32 4877.18,3823.14 4875.03,3817.13 4872.31,3811.37 4869.03,3805.9 4865.23,3800.78 4860.95,3796.05 4856.22,3791.77 4851.1,3787.97 4845.63,3784.69 4839.87,3781.97 4833.86,3779.82 4827.68,3778.27 4821.37,3777.33 4815,3777.02 4808.63,3777.33 4802.32,3778.27 4796.14,3779.82 4790.13,3781.97 4784.37,3784.69 4778.9,3787.97 4773.78,3791.77 4769.05,3796.05 4764.77,3800.78 4760.97,3805.9 4757.69,3811.37 4754.97,3817.13 4752.82,3823.14 4751.27,3829.32 4750.33,3835.63 4750.02,3842 4750.33,3848.37 4751.27,3854.68 4752.82,3860.86 4754.97,3866.87 4757.69,3872.63 4760.97,3878.1 4764.77,3883.22 4769.05,3887.95 4773.78,3892.23 4778.9,3896.03 4784.37,3899.31 4790.13,3902.03 4796.14,3904.18 4802.32,3905.73 4808.63,3906.67 4815,3906.98
+3V3 on L3 (split plane): 4821.37,1248.67 4827.68,1247.73 4833.86,1246.18 4839.87,1244.03 4845.63,1241.31 4851.1,1238.03 4856.22,1234.23 4860.95,1229.95 4865.23,1225.22 4869.03,1220.1 4872.31,1214.63 4875.03,1208.87 4877.18,1202.86 4878.73,1196.68 4879.67,1190.37 4879.98,1184 4879.67,1177.63 4878.73,1171.32 4877.18,1165.14 4875.03,1159.13 4872.31,1153.37 4869.03,1147.9 4865.23,1142.78 4860.95,1138.05 4856.22,1133.77 4851.1,1129.97 4845.63,1126.69 4839.87,1123.97 4833.86,1121.82 4827.68,1120.27 4821.37,1119.33 4815,1119.02 4808.63,1119.33 4802.32,1120.27 4796.14,1121.82 4790.13,1123.97 4784.37,1126.69 4778.9,1129.97 4773.78,1133.77 4769.05,1138.05 4764.77,1142.78 4760.97,1147.9 4757.69,1153.37 4754.97,1159.13 4752.82,1165.14 4751.27,1171.32 4750.33,1177.63 4750.02,1184 4750.33,1190.37 4751.27,1196.68 4752.82,1202.86 4754.97,1208.87 4757.69,1214.63 4760.97,1220.1 4764.77,1225.22 4769.05,1229.95 4773.78,1234.23 4778.9,1238.03 4784.37,1241.31 4790.13,1244.03 4796.14,1246.18 4802.32,1247.73 4808.63,1248.67 4815,1248.98
ACFUSE on L3 (split plane): 4457.05,3452.88 4457.05,3444.51 4457.34,3441.57 4458.19,3438.74 4459.59,3436.13 4461.46,3433.85 4709.3,3186.01 4709.3,2780.08 4477.08,2780.08 4477.08,3100 4476.76,3105.61 4475.82,3111.14 4474.27,3116.54 4472.12,3121.73 4469.4,3126.64 4466.15,3131.22 4462.41,3135.41 4458.22,3139.15 4453.64,3142.4 4448.73,3145.12 4443.54,3147.27 4438.14,3148.82 4432.61,3149.76 4427,3150.08 4100.08,3150.08 4100.08,3509.93 4457.05,3509.93
+3V3 on L3 (split plane): 3999.92,3150.08 3718.08,3150.08 3718.08,3979.9 3999.92,3979.9
+3V3 on L3 (split plane): 1186.37,3906.67 1192.68,3905.73 1198.86,3904.18 1204.87,3902.03 1210.63,3899.31 1216.1,3896.03 1221.22,3892.23 1225.95,3887.95 1230.23,3883.22 1234.03,3878.1 1237.31,3872.63 1240.03,3866.87 1242.18,3860.86 1243.73,3854.68 1244.67,3848.37 1244.98,3842 1244.67,3835.63 1243.73,3829.32 1242.18,3823.14 1240.03,3817.13 1237.31,3811.37 1234.03,3805.9 1230.23,3800.78 1225.95,3796.05 1221.22,3791.77 1216.1,3787.97 1210.63,3784.69 1204.87,3781.97 1198.86,3779.82 1192.68,3778.27 1186.37,3777.33 1180,3777.02 1173.63,3777.33 1167.32,3778.27 1161.14,3779.82 1155.13,3781.97 1149.37,3784.69 1143.9,3787.97 1138.78,3791.77 1134.05,3796.05 1129.77,3800.78 1125.97,3805.9 1122.69,3811.37 1119.97,3817.13 1117.82,3823.14 1116.27,3829.32 1115.33,3835.63 1115.02,3842 1115.33,3848.37 1116.27,3854.68 1117.82,3860.86 1119.97,3866.87 1122.69,3872.63 1125.97,3878.1 1129.77,3883.22 1134.05,3887.95 1138.78,3892.23 1143.9,3896.03 1149.37,3899.31 1155.13,3902.03 1161.14,3904.18 1167.32,3905.73 1173.63,3906.67 1180,3906.98
+3V3 on L3 (split plane): 3617.92,3100 3618.24,3094.39 3619.18,3088.86 3620.73,3083.46 3622.88,3078.27 3625.6,3073.36 3628.85,3068.78 3632.59,3064.59 3636.78,3060.85 3641.36,3057.6 3646.27,3054.88 3651.46,3052.73 3656.86,3051.18 3662.39,3050.24 3668,3049.92 4376.92,3049.92 4376.92,2730 4377.24,2724.39 4378.18,2718.86 4379.73,2713.46 4381.88,2708.27 4384.6,2703.36 4387.85,2698.78 4391.59,2694.59 4395.78,2690.85 4400.36,2687.6 4405.27,2684.88 4410.46,2682.73 4415.86,2681.18 4421.39,2680.24 4427,2679.92 4979.9,2679.92 4979.9,1020.1 1020.1,1020.1 1020.1,3979.9 3617.92,3979.9
+3V3 on L3 (split plane): 1197.37,1248.67 1203.68,1247.73 1209.86,1246.18 1215.87,1244.03 1221.63,1241.31 1227.1,1238.03 1232.22,1234.23 1236.95,1229.95 1241.23,1225.22 1245.03,1220.1 1248.31,1214.63 1251.03,1208.87 1253.18,1202.86 1254.73,1196.68 1255.67,1190.37 1255.98,1184 1255.67,1177.63 1254.73,1171.32 1253.18,1165.14 1251.03,1159.13 1248.31,1153.37 1245.03,1147.9 1241.23,1142.78 1236.95,1138.05 1232.22,1133.77 1227.1,1129.97 1221.63,1126.69 1215.87,1123.97 1209.86,1121.82 1203.68,1120.27 1197.37,1119.33 1191,1119.02 1184.63,1119.33 1178.32,1120.27 1172.14,1121.82 1166.13,1123.97 1160.37,1126.69 1154.9,1129.97 1149.78,1133.77 1145.05,1138.05 1140.77,1142.78 1136.97,1147.9 1133.69,1153.37 1130.97,1159.13 1128.82,1165.14 1127.27,1171.32 1126.33,1177.63 1126.02,1184 1126.33,1190.37 1127.27,1196.68 1128.82,1202.86 1130.97,1208.87 1133.69,1214.63 1136.97,1220.1 1140.77,1225.22 1145.05,1229.95 1149.78,1234.23 1154.9,1238.03 1160.37,1241.31 1166.13,1244.03 1172.14,1246.18 1178.32,1247.73 1184.63,1248.67 1191,1248.98

## Other copper
Top Layer:
  region net ACFUSE: 4151.43,3500 4450,3500 4450,3439.59 4700,3189.59 4700,2900 4500,2900 4500,3150 4450,3200 4150.71,3200
  region net "AC In": 4700,3428.37 4700,3242.07 4750,3242.07 4750,2900 4950,2900 4950,3428.37
  region net "AC Out": 4150,3798.59 4150,3550 4151.43,3551.43 4500,3551.43 4500,3482.81 4950,3482.81 4950,3649.12 4607.41,3649.12 4607.41,3800
  region: 4151.43,3477.5
Bottom Layer:
  region net ACFUSE: 4151.43,3500 4450,3500 4450,3439.59 4700,3189.59 4700,2900 4500,2900 4500,3150 4450,3200 4150.71,3200
  region net "AC In": 4700,3428.37 4700,3242.07 4750,3242.07 4750,2900 4950,2900 4950,3428.37
  region net "AC Out": 4150,3798.59 4150,3550 4151.43,3551.43 4500,3551.43 4500,3482.81 4950,3482.81 4950,3649.12 4607.41,3649.12 4607.41,3800
L2 (plane layer: these items are gaps in the copper):
  circle w50: c4815,3842 r90
  circle w50: c1191,1184 r90
  circle w50: c1180,3842 r90
  circle w50: c4815,1184 r90
  region: 3675,4000 4050,4000 4050,3100 3675,3100
  region: 4150,3550
  region: 4000,4150
  lines w30: 4075,3525 4470.12,3525 4472.27,3522.85 4472.27,3444.6 4725,3191.87 4725,2725 ; 4472.27,3450 5000,3450
  lines w100: 3675,4000 3675,3100 4425,3100 4425,2725 5000,2725 ; 4050,3100 4050,4000
L3 (plane layer: these items are gaps in the copper):
  circle w50: c4815,1184 r90
  circle w50: c4815,3842 r90
  circle w50: c1180,3842 r90
  circle w50: c1191,1184 r90
  lines w30: 4050,3525 4472.12,3525 4472.12,3452.88 4472.12,3444.51 4724.38,3192.25 4724.38,2730 ; 4475,3450 5000,3450
  lines w100: 3668,3999 3668,3100 4427,3100 4427,2730 5000,2730 ; 4050,3100 4050,4000

## Silkscreen, mask and mechanical layers (free items; w line width, h text height)
Top Overlay:
  lines w30: 3644,3980 3644,2731 3645,2730 5000,2730
  text "HIGH VOLTAGE" at 4005,3906 h60
  text "AC OUT" at 4753,3705 h30
  text "AC IN" at 4958,3284 h30 r90
  text "FAN POWER" at 4647,2583 h30
  text "PBLU" at 4931,2419 h30 r90
  text "-BLK" at 4931,2201.5 h30 r90
  text "+RED" at 4931,1984 h30 r90
  text "+12FAN" at 4931,1646 h30 r90
  text "GNDFAN" at 4931,1400 h30 r90
  text "DOOR SENSOR" at 4366,1143 h30 r90
  text "-Blu" at 3716,1081 h30
  text "Blk" at 3952,1081 h30
  text "+Brn" at 4141,1081 h30
  text "+12V" at 2921,1058 h30
  text "GND" at 3135,1058 h30

## Text inside footprints (layer, text, board x,y; h text height)
J4: Top Overlay "1" at 3050.33,3990.24 h30 r180; Top Overlay "2" at 3050.38,3669.58 h30 r180